# Altium PCB nguon24v.PcbDoc
Units mm, origin at the board's own origin, x right, y up, seen from the top; angles counter-clockwise.
Board outline 100 x 50 mm, 2 copper layers (Top Layer, Bottom Layer); 10 components, 6 nets, 24 pads, 0 vias.
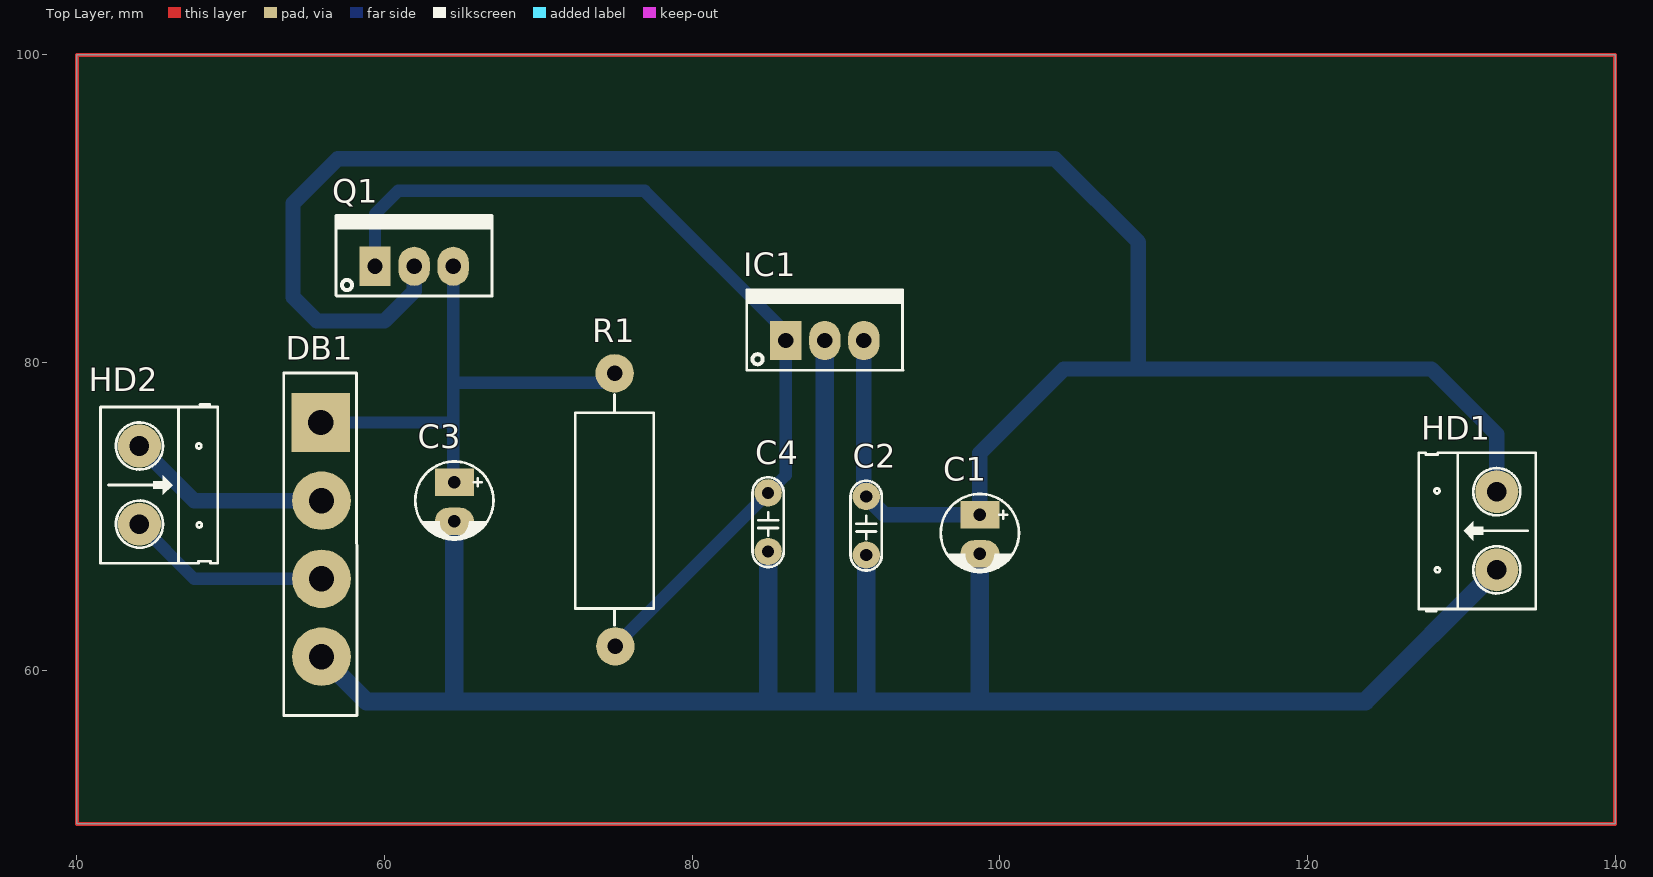
[diagram p0: Top Layer view]
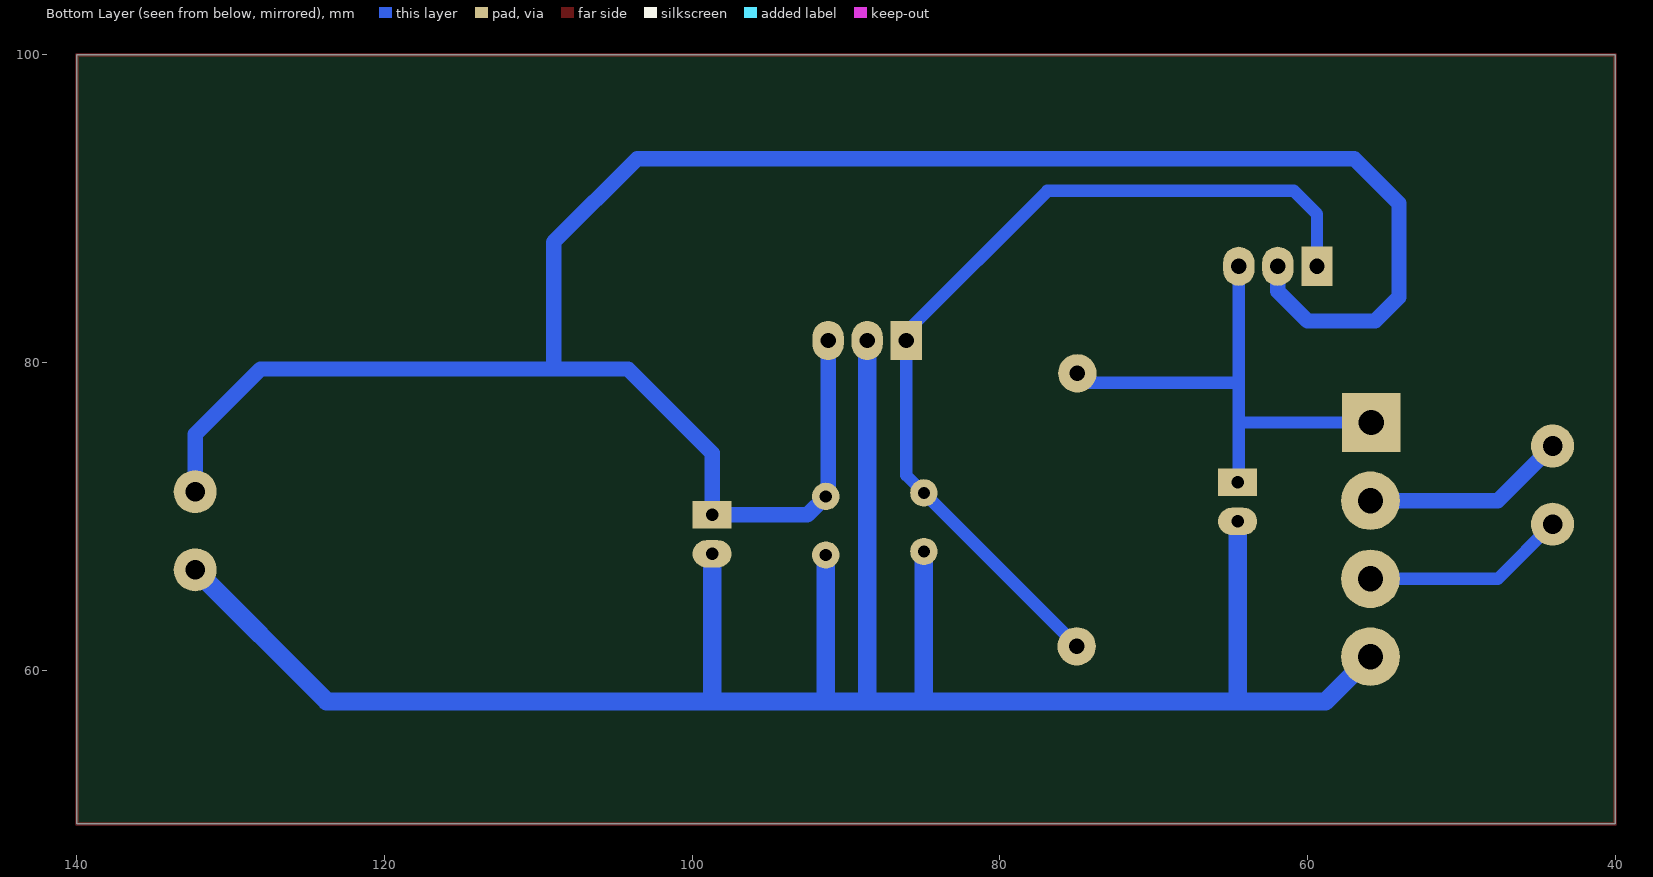
[diagram p1: Bottom Layer view, seen from below]
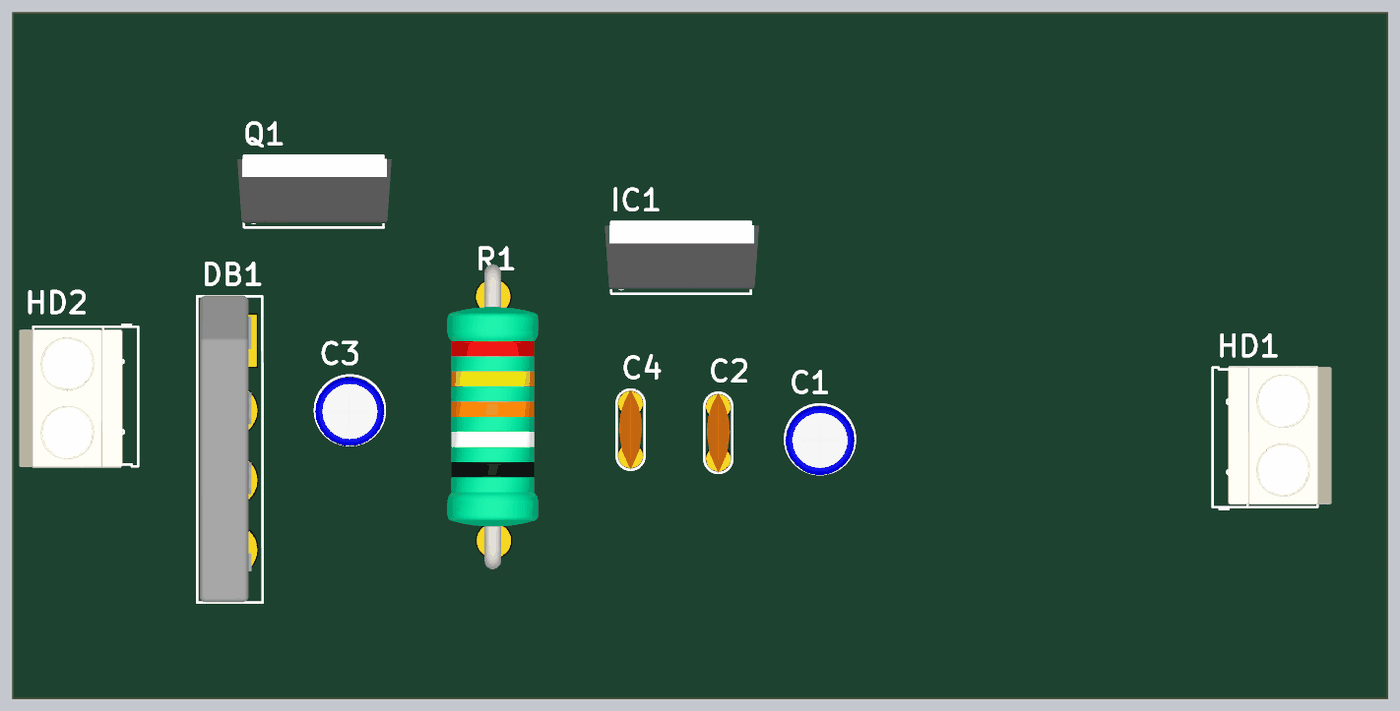
[diagram p2: 3D render of the assembled board from above, using the file's embedded part models]

## Layer stack, top to bottom
Top Solder: solder mask 0.0102, Solder Resist, Dk 3.5
Top Layer: signal copper 0.0356
Dielectric 1: dielectric 0.32, FR-4, Dk 4.8
Bottom Layer: signal copper 0.0356
Bottom Solder: solder mask 0.0102, Solder Resist, Dk 3.5

## Board outline
40,50 140,50 140,100 40,100

## Design rules (kind name [scope] priority, off if disabled: settings)
Clearance [All] p1: gap=0.8
PolygonConnect [All] p1: connectstyle=Relief reliefconductorwidth=0.254 reliefentries=4 polygonreliefangle="90 Angle" airgapwidth=0.254
RoutingLayers [All] p1: top layer_v5=FALSE bottom layer_v5=TRUE
RoutingVias [All] p1: holewidth=0.711 width=1.27 viastyle="Through Hole" minholewidth=0.711 minwidth=1.27 maxholewidth=0.711 maxwidth=1.27
SolderMaskExpansion [All] p1: expansion=0.102
Width NET [InNetClass('NET CLASS')] p1: maxlimit=0.8 minlimit=0.8 preferedwidth=0.8
Width Vout [InNet('VOUT')] p2: maxlimit=1 minlimit=1 preferedwidth=1
Width Vin [InNet('VIN')] p3: maxlimit=1 minlimit=1 preferedwidth=1
Width GND [InNet('GND')] p4: maxlimit=1.2 minlimit=1.2 preferedwidth=1.2
29 further rules are at their usual default settings.

## Components (designator, comment, footprint, x,y, rotation, side; value= is the part's Value field where it differs from the comment)
C1 "2200uF" CP1/2 98.704,70.104 r270 top
C2 "104" CN1.5 91.313,67.488 r90 top
C3 "2200uF" CP1/2 64.541,72.212 r270 top
C4 "104" CN1.5 84.938,67.716 r90 top
DB1 "6A 1000V" "DIODE CAU 6A CAM" 55.905,76.098 r270 top
HD1 "Header 2" HED2 132.309,66.523 r90 top
HD2 "Header 2" HED2 44.069,74.574 r270 top
IC1 "LM7812" QTO-220 86.081,81.432 r0 top
Q1 "TIP42C" QTO-220 59.385,86.258 r0 top
R1 "47/2W" R2W 74.955,79.299 r270 top

## Footprints (in the part's own frame and the unit in brackets; to place one, negate y for a bottom-side part, rotate by r counter-clockwise, add the part's x,y. Pads: shape width x height; smd on the part's side, far side on the other; paste and mask are expansions set on the pad)
CN1.5 [mil]
  round 70 hole 31: 1(0,0) 2(150,0)
  silkscreen extent -40,-40 190,40, body extent -40,-33 190,33, height 235
CP1/2 [mil] "Tu hoa < 22uF/16>50V"
  rect 70x100 hole 32: 1(0,0)
  oval 70x100 hole 32: 2(100,0)
  silkscreen extent -53,-100 146,100, body extent -49,-99 149,99, height 287
"DIODE CAU 6A CAM" [mil] "DIODE CAU 6A CAM"
  rect 150x150 hole 65: 1(0,-2)
  round 150 hole 65: 2(200,0) 3(400,0) 4(599,0)
  silkscreen extent -127,-97 750,90, body extent -129,-90 749,58, height 937
HED2 [mil] "Header 2, 2 pin, hight 300mil, Pin to Pin 200, Colour Green"
  round 110 hole 50: 1(0,0) 2(200,0)
  silkscreen extent -106,-100 300,200, body extent -92,-140 302,155, height 394
QTO-220 [mil] "TO-220 - 1-2-3"
  rect 80x100 hole 39: 1(0,0)
  oval 80x100 hole 39: 2(100,0) 3(200,0)
  silkscreen extent -100,-76 300,130, body extent -119,-64 322,121, height 755
R2W [mm] "R2W, 2 pin, 700mil"
  round 2.5 hole 1: 1(0,0) 2(17.755,0.051)
  silkscreen extent 1.37,-2.57 16.38,2.54, body extent -2.36,-3.33 19.84,3.27, height 8.3

## Part data
C1 C3: library part CP1, "Cap P  0,1uF < 22uF , 16 - 50V"
C2 C4: library part CN1.5, "Cap np 682pF => 104pF"
DB1: library part "Diode CAU 6A", "C?m"
HD1 HD2: library part Hed2, "Header 2 (Green)"
IC1: library part LM78xx, "On ap +, from + 5 to + 24VDC"
Q1: "PNP 2W, BCE"
R1: library part R2W, "Resistor 2W"

## Nets (pads, with @x,y where several pads share a name; then routed paths per layer and width w, separated by ;. In a path a pad name is that pad's centre, name@x,y a point inside that pad or via, vN(x,y) a via of type N, cw(c..) or ccw(c..) an arc to the next point about the centre after c; other vN are vias at no path point)
GND: C1.2 C2.1 C3.2 C4.1 DB1.4 HD1.1 IC1.2 | length 145.4
  Bottom Layer w1.2: DB1.4 58.826,57.963 64.592,57.963 ; C3.2 64.541,58.014 64.592,57.963 ; C4.1 84.938,58.166 85.141,57.963 ; IC1.2 88.621,58.064 88.519,57.963 ; C2.1 91.313,58.039 91.389,57.963 ; C1.2 98.704,58.039 98.628,57.963 ; HD1.1 123.749,57.963 98.628,57.963 ; 64.592,57.963 85.141,57.963 ; 85.141,57.963 88.519,57.963 ; 88.519,57.963 91.389,57.963 ; 91.389,57.963 98.628,57.963
NetC3_1: C3.1 DB1.1 Q1.3 R1.1 | length 33.5
  Bottom Layer w0.8: DB1.1 64.364,76.098 64.465,76.2 ; Q1.3 64.465,78.715 ; C3.1 64.465,72.288 64.465,76.2 ; R1.1 74.346,78.689 64.491,78.689 64.465,78.715 ; 64.465,76.2 64.465,78.715
NetC4_2: C4.2 IC1.1 Q1.1 R1.2 | length 60
  Bottom Layer w0.8: Q1.1 59.385,89.662 60.884,91.161 76.911,91.161 86.081,81.991 IC1.1 86.081,72.669 C4.2 75.006,61.595 R1.2 ; R1.2@75.006,60.935 R1.2@75.311,61.239
NetDB1_3: DB1.3 HD2.2 | length 13.3
  Bottom Layer w0.8: HD2.2 47.625,65.938 DB1.3
VIN: DB1.2 HD2.1 | length 13.3
  Bottom Layer w1: HD2.1 47.625,71.018 DB1.2
VOUT: C1.1 C2.2 HD1.2 IC1.3 Q1.2 | length 147.1
  Bottom Layer w1: Q1.2 61.925,84.633 59.995,82.702 55.601,82.702 54.051,84.252 54.051,90.348 56.947,93.243 103.581,93.243 109.004,87.82 108.991,87.808 108.991,79.578 ; IC1.3 91.161,71.45 C2.2 92.507,70.104 C1.1 98.704,74.117 104.165,79.578 108.991,79.578 ; HD1.2 132.309,75.336 128.067,79.578 108.991,79.578
copper on no net: | length 300
  Top Layer w0.254: 40,50 140,50 140,100 40,100 40,50